# Altium PCB SensorBoardPCB.PcbDoc
Units mm, origin at the board's own origin, x right, y up, seen from the top; angles counter-clockwise.
Board outline 99.95 x 99.95 mm, 2 copper layers (Top Layer, Bottom Layer); 19 components, 29 nets, 128 pads, 0 vias.
Unrouted connection lines stored in the file: 70.
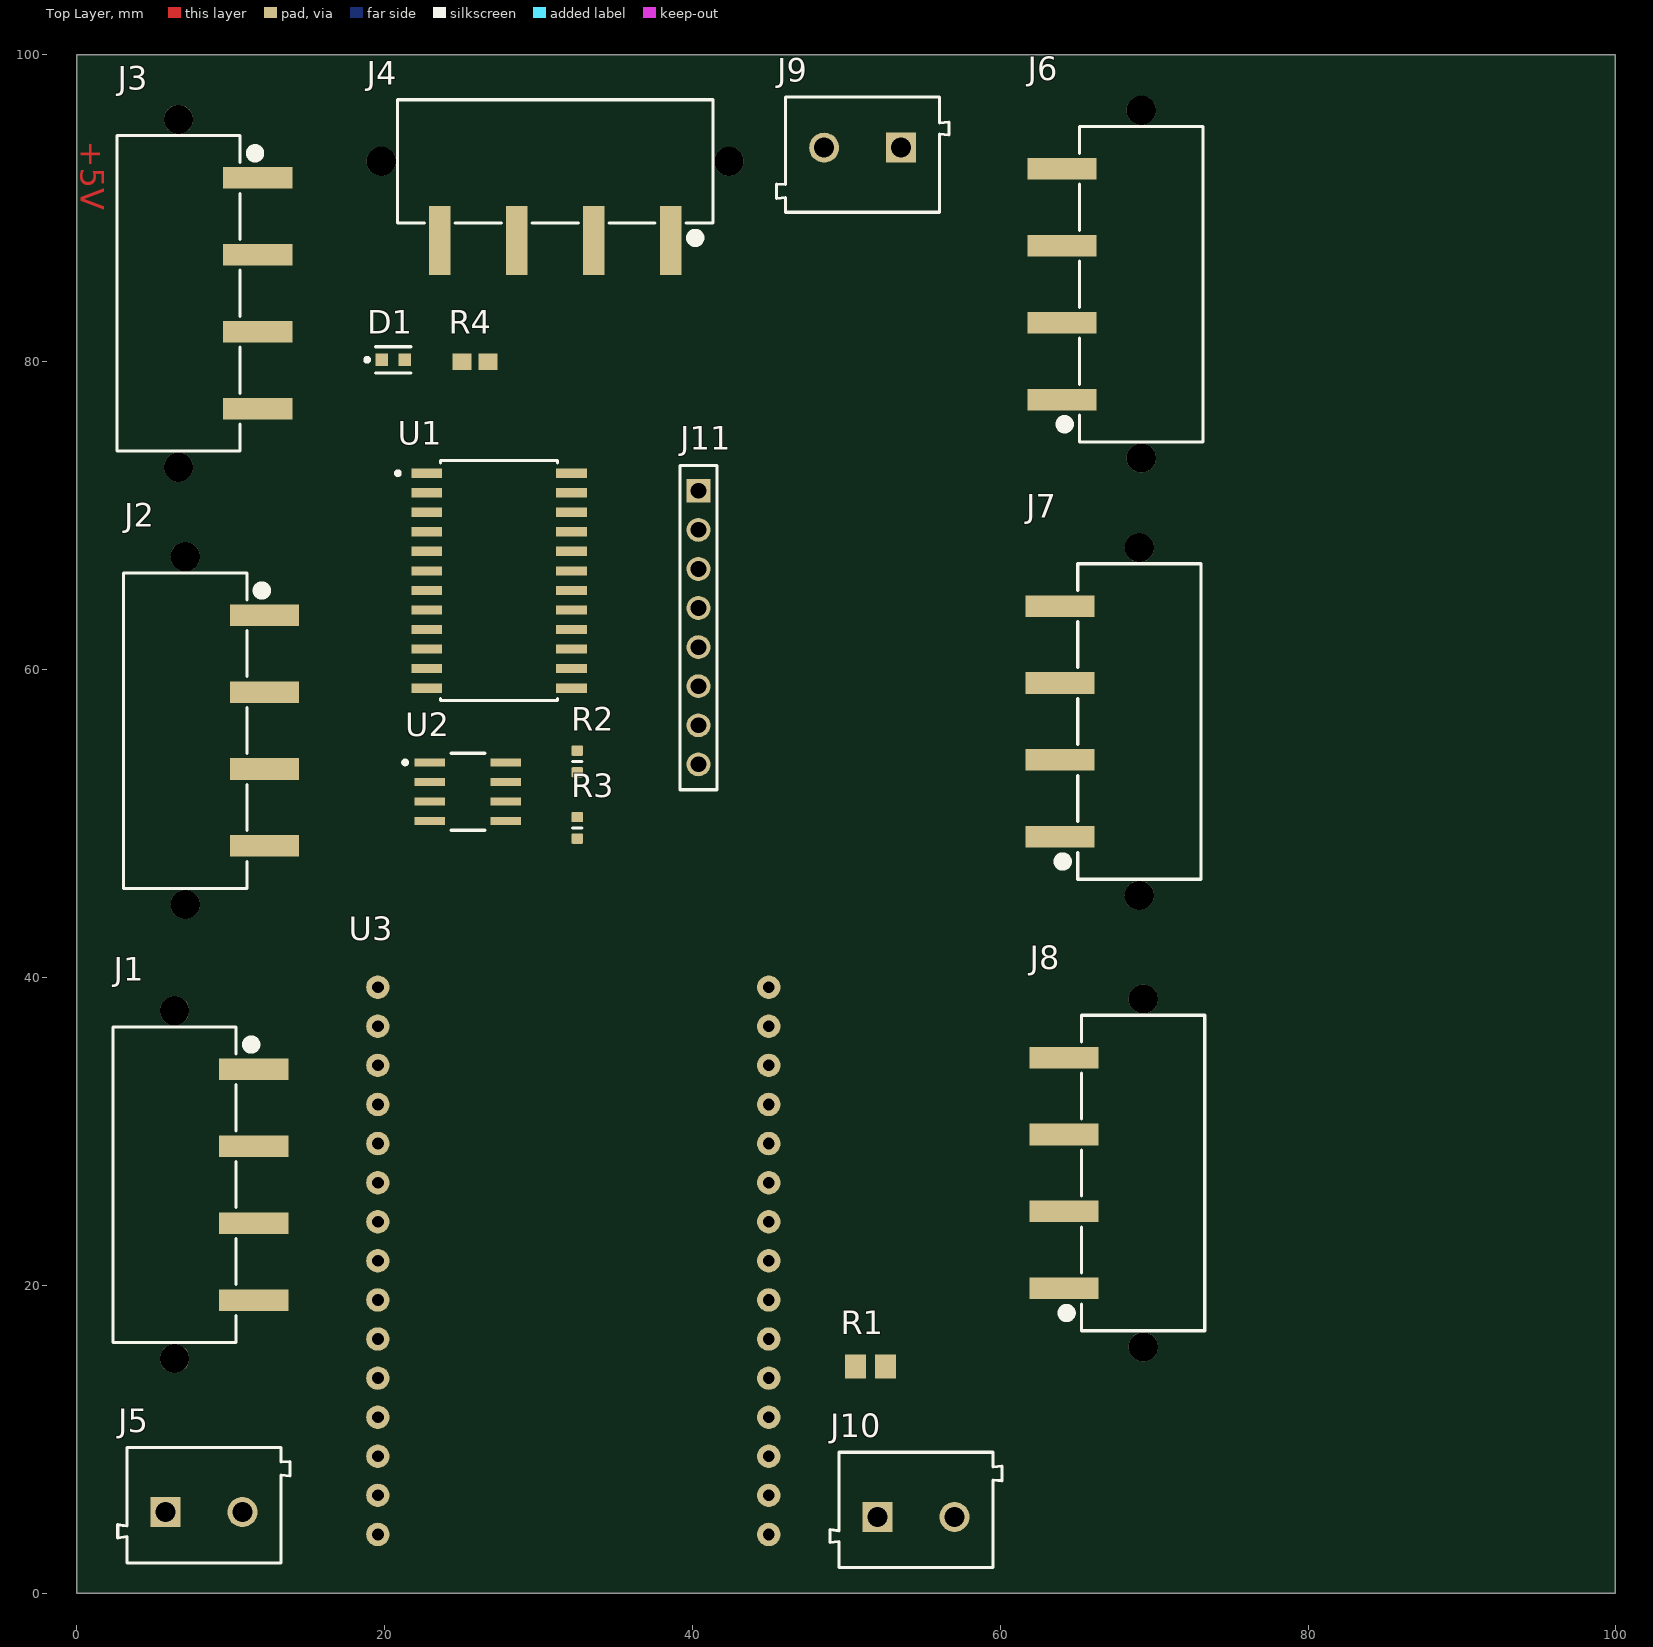
[diagram p0: Top Layer view]
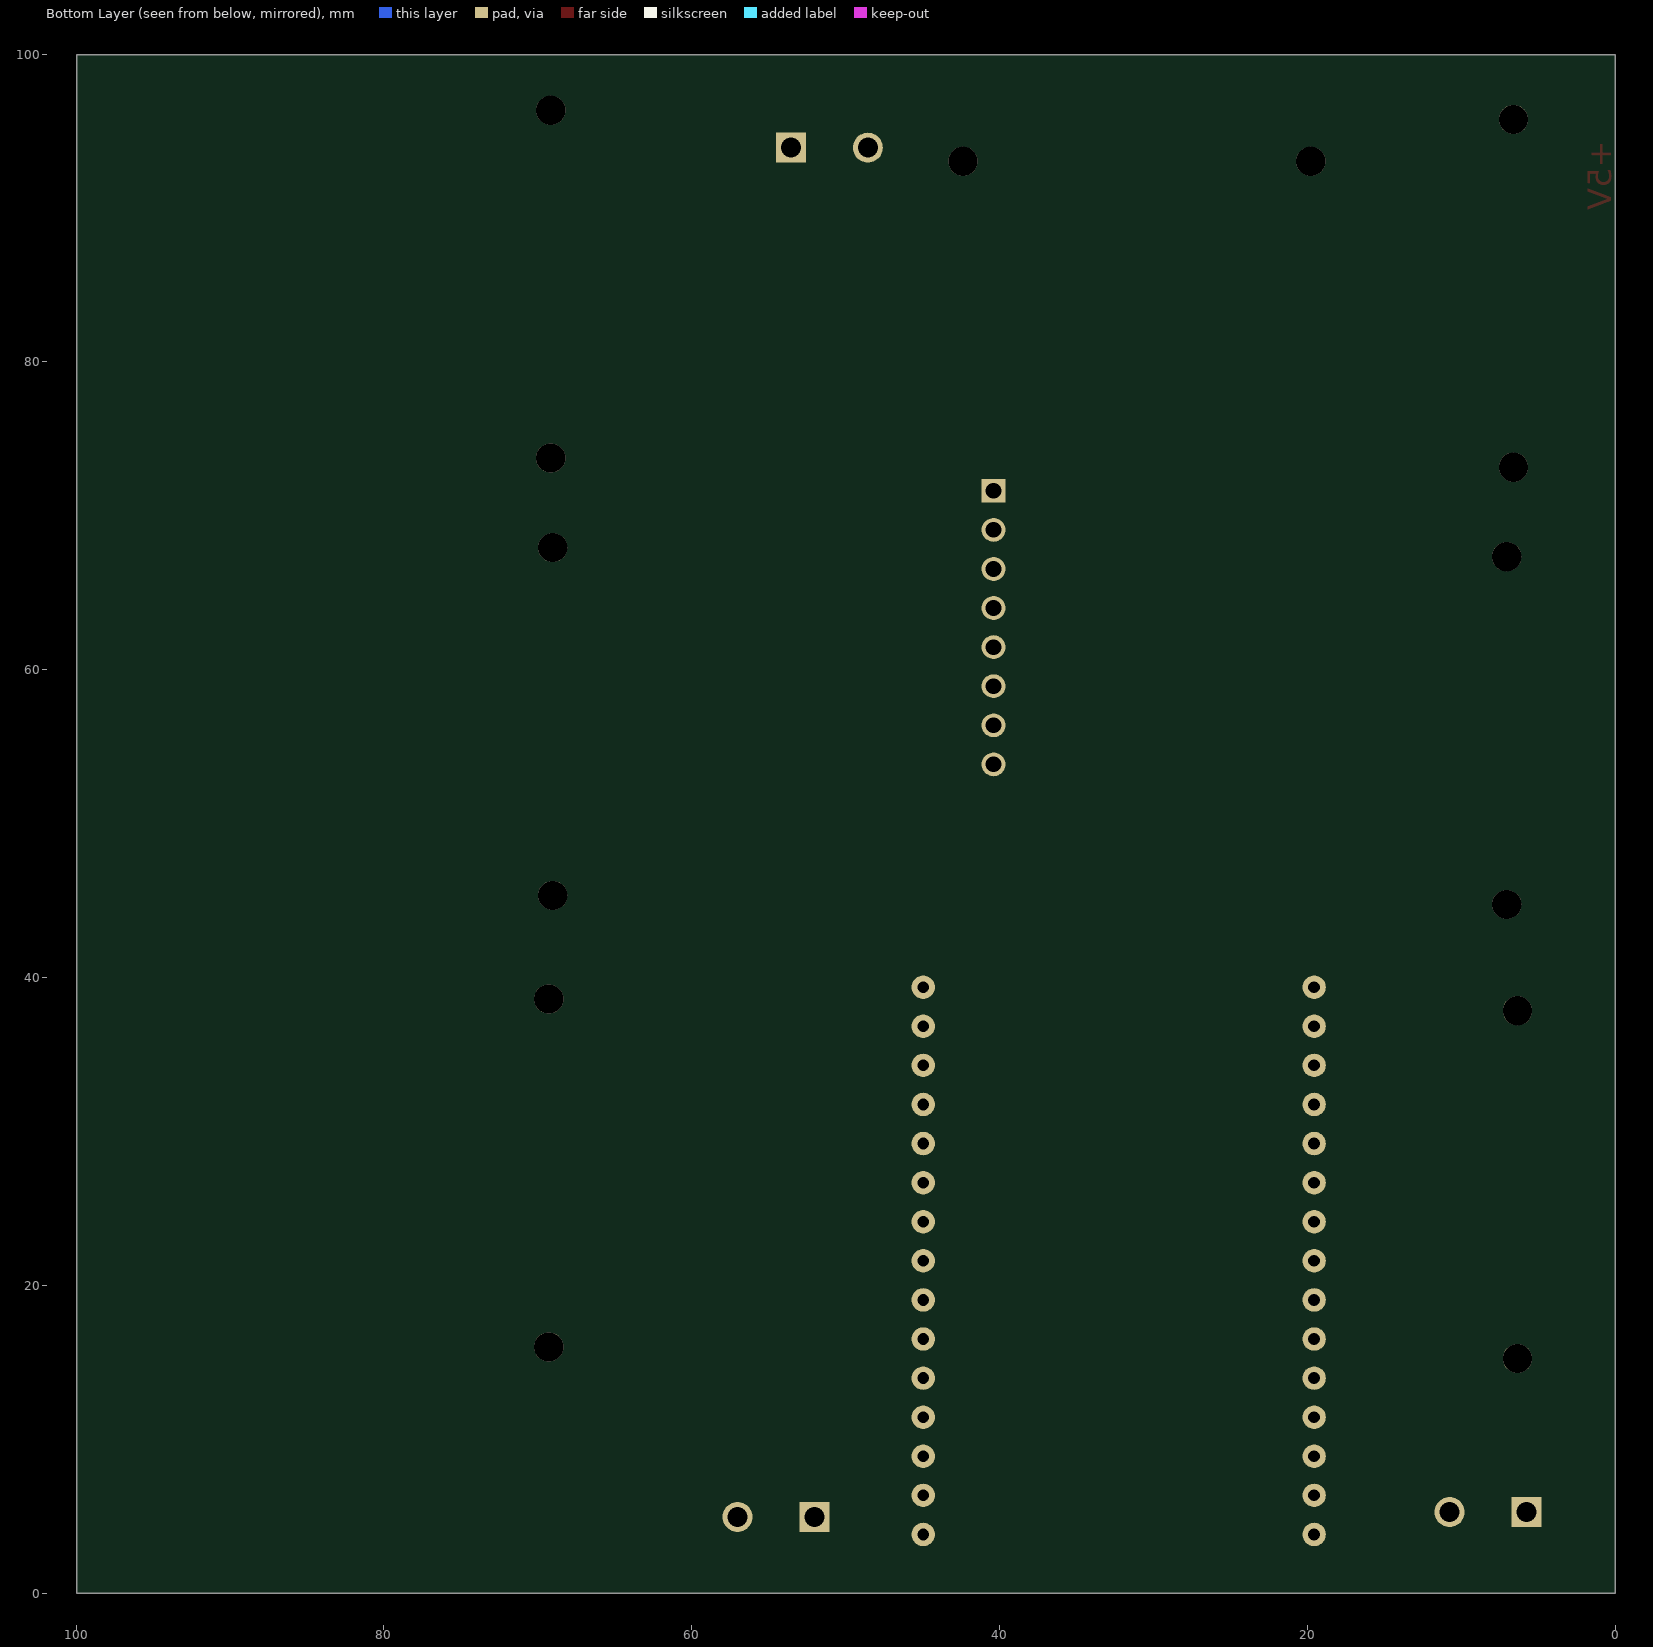
[diagram p1: Bottom Layer view, seen from below]

## Layer stack, top to bottom
Top Solder: solder mask 0.0102, Solder Resist, Dk 3.5
Top Layer: signal copper 0.0356
Dielectric 1: dielectric 0.32, FR-4, Dk 4.8
Bottom Layer: signal copper 0.0356
Bottom Solder: solder mask 0.0102, Solder Resist, Dk 3.5

## Board outline
0,0 0,99.949 99.949,99.949 99.949,0

## Design rules (kind name [scope] priority, off if disabled: settings)
Clearance [All] p1: gap=0.254 ignorepadtopadclearanceinfootprint=FALSE except(0: Arc-Hole Track-Hole SMDPad-Hole THPad-Hole Via-Hole Fill-Hole Poly-Hole Region-Hole Text-Hole)
PolygonConnect [All] p1: connectstyle=Relief reliefconductorwidth=0.254 reliefentries=4 polygonreliefangle="90 Angle" airgapwidth=0.254
RoutingVias [All] p1: holewidth=0.711 width=1.27 viastyle="Through Hole" minholewidth=0.711 minwidth=1.27 maxholewidth=0.711 maxwidth=1.27
SolderMaskExpansion [All] p1: expansion=0.102 istentingtop=FALSE
Width [All] p1: maxlimit=0.254 minlimit=0.254 preferedwidth=0.254
30 further rules are at their usual default settings.

## Classes and differential pairs
component class SensorBoardSchematic: D1 J1 J2 J3 J7 J8 R1 R4 U1 U2 U3

## Components (designator, comment, footprint, x,y, rotation, side; value= is the part's Value field where it differs from the comment)
D1 "LTST-C190KFKT" FP-LTST-C190KFKT-MFG 20.562,80.137 r0 top
J1 "691709710304" 691709710304 6.35,26.543 r270 top
J2 "691709710304" 691709710304 7.042,56.047 r270 top
J3 "691709710304" 691709710304 6.604,84.455 r270 top
J4 "691709710304" 691709710304 31.075,93.034 r180 top
J5 "691102710002" 691102710002 8.255,5.715 r0 top
J6 "691709710304" 691709710304 69.158,85.05 r90 top
J7 "691709710304" 691709710304 69.031,56.635 r90 top
J8 "691709710304" 691709710304 69.285,27.298 r90 top
J9 "691102710002" 691102710002 51.054,93.472 r180 top
J10 "691102710002" 691102710002 54.523,5.403 r0 top
J11 "SSQ-108-01-T-S" SMTC-SSQ-108-01-X-S 40.386,71.628 r270 top
R1 "ERJ-6ENF4700V" RESC2013X70X40ML20T20 51.562,14.732 r0 top
R2 "Jumper 0603" RESC0603(1608)_L 32.512,54.037 r270 top value=120
R3 "Jumper 0603" RESC0603(1608)_L 32.512,49.719 r270 top value=DNF
R4 "FC0603E50R0BTBST1" RESC1608X38X38ML15T13 25.869,80.01 r0 top
U1 "CD74HC4067M96" FP-DW0024A-MFG 27.432,65.786 r0 top
U2 "MAX3485ESA+" FP-S8-5-MFG 25.4,52.07 r0 top
U3 "ESP32-WROOM-32-DEVBOARD_HEADERS" ESP32-WROOM-32-DEVBOARD_HEADERS-Footprint-1 19.558,39.37 r0 top

## Footprints (in the part's own frame and the unit in brackets; to place one, negate y for a bottom-side part, rotate by r counter-clockwise, add the part's x,y. Pads: shape width x height; smd on the part's side, far side on the other; paste and mask are expansions set on the pad)
691102710002 [mm] "5,00mm - modular - blue - Horizontal entry with pressure clamp - 9,9 mm height - 02p"
  rect 1.95x1.95 hole 1.3: 1(-2.5,-0.45)
  round 1.95 hole 1.3: 2(2.5,-0.45)
  silkscreen extent -5.6,-3.75 5.6,3.75, body extent -5.6,-3.75 5.6,3.75, height 9.96
691709710304 [mm] "Horizontal Entry SMT with Pressure Clamp, pitch 5mm, 04p"
  rect 1.4x4.5 smd: 1(-7.5,5.15) 2(-2.5,5.15) 3(2.5,5.15) 4(7.5,5.15)
  round 1.9 hole 1.9 unplated: M1(-11.3,0) M2(11.3,0)
  silkscreen extent -10.25,-4 10.25,5.17, body extent -12,-4 12,7, height 9.95
ESP32-WROOM-32-DEVBOARD_HEADERS-Footprint-1 [mil]
  round 60 hole 30: 3V3(1000,-1400) 5(0,-100) 5V0(0,-1400) 8(0,-200) 9(0,0) 10(0,-300) 11(0,-400) 12(0,-500) 13(0,-600) 14(0,-700) 15(0,-800) 16(0,-900) 17(0,-1000) 18(0,-1100) 20(0,-1200) 21(1000,-1200) 22(1000,-1100) 24(1000,-1000) 25(1000,-900) 27(1000,-800) 34(1000,-700) 35(1000,-600) 36(1000,0) 38(1000,-500) 39(1000,-100) 40(1000,-300) 41(1000,-200) 42(1000,-400) GND1(0,-1300) GND2(1000,-1300)
  body extent -85,-1490 1085,90, height 79
FP-DW0024A-MFG [mm]
  rect 2x0.6 smd paste-1000 mask+0: 1(-4.7,6.985) 2(-4.7,5.715) 3(-4.7,4.445) 4(-4.7,3.175) 5(-4.7,1.905) 6(-4.7,0.635) 7(-4.7,-0.635) 8(-4.7,-1.905) 9(-4.7,-3.175) 10(-4.7,-4.445) 11(-4.7,-5.715) 12(-4.7,-6.985) 13(4.7,-6.985) 14(4.7,-5.715) 15(4.7,-4.445) 16(4.7,-3.175) 17(4.7,-1.905) 18(4.7,-0.635) 19(4.7,0.635) 20(4.7,1.905) 21(4.7,3.175) 22(4.7,4.445) 23(4.7,5.715) 24(4.7,6.985)
  silkscreen extent -6.7,-7.8 3.8,7.8, body extent -5.8,-7.98 5.8,7.98, height 0.25
FP-LTST-C190KFKT-MFG [mm]
  rect 0.8x0.8 smd paste+0 mask+0: 1(-0.75,0) 2(0.75,0)
  silkscreen extent -1.82,-0.85 1.15,0.85, body extent -1.25,-0.55 1.25,0.55, height 0.25
FP-S8-5-MFG [mm]
  rect 1.98x0.53 smd paste+0 mask+0: 1(-2.465,1.905) 2(-2.465,0.635) 3(-2.465,-0.635) 4(-2.465,-1.905) 5(2.465,-1.905) 6(2.465,-0.635) 7(2.465,0.635) 8(2.465,1.905)
  silkscreen extent -4.2,-2.5 1.1,2.5, body extent -3.55,-2.75 3.55,2.75, height 0.25
RESC0603(1608)_L [mm] "Chip Resistor, Body 1.6x0.8mm, IPC High Density"
  rrect25% 0.66x0.76 smd: 1(-0.7,0) 2(0.7,0)
  silkscreen extent 0,-0.3 0,0.3, body extent -0.8,-0.4 0.8,0.4, height 0.45
RESC1608X38X38ML15T13 [mm] "Chip Resistor, 2-Leads, Body 1.63x0.81mm, IPC Low Density"
  rect 1.25x1.05 smd: 1(-0.85,0) 2(0.85,0)
  body extent -0.89,-0.49 0.89,0.49, height 0.39
RESC2013X70X40ML20T20 [mm] "Chip Resistor, 2-Leads, Body 2.00x1.25mm, IPC Low Density"
  rect 1.35x1.55 smd: 1(-0.975,0) 2(0.975,0)
  body extent -1.1,-0.72 1.1,0.72, height 0.7
SMTC-SSQ-108-01-X-S [mm] "SQ Post Socket, 1x8 Pins, Vertical, 2.54mm Pitch, Female"
  rect 1.55x1.55 hole 1.02: 1(0,0)
  round 1.55 hole 1.02: 2(2.54,0) 3(5.08,0) 4(7.62,0) 5(10.16,0) 6(12.7,0) 7(15.24,0) 8(17.78,0)
  silkscreen extent -1.65,-1.2 19.43,1.2, body extent -1.52,-1.21 19.3,1.21, height 8.51

## Part data
D1: library part CMP-1674-00008-2, "LED ORANGE CLEAR CHIP SMD", Case Code (Imperial)=0603, Case Code (Metric)=1608, Color=Orange, Forward Current=30mA, Forward Voltage=2V, Lens Color=Colorless, Max Operating Temperature=85°C, Min Operating Temperature=-55°C, Package Quantity=1, Power Dissipation=75mW, Reverse Voltage=5V, Test Current=20mA, Case/Package=0603, Depth=1.6mm, Dominant Wavelength=605nm, Height=0.8mm, Illumination Color=Orange, Lead Free="Lead Free", Length=3.2mm, Lens Style=Diffused, Lens Transparency=Clear, Luminous Intensity=90mcd, Mount="Surface Mount", Number of Elements=1, Number of LEDs=1, Number of Pins=2, Packaging="Tape and Reel", Power Rating=75mW, Radiation Hardening=No, Viewing Angle=130°, Wavelength=611nm, Width=0.8mm
J1 J2 J3 J4 J6 J7 J8: library part CMP-1502-03337-1, "Serie 7097 - 5.00 mm Horizontal Entry SMT with Pressure Clamp WR-TBL, 4 pin", Manufacturer="Wurth Elektronik", Operating Temperature=-45to130degC, Datasheet URL=http://katalog.we-online.de/em/datasheet/6917097103xx.pdf, Manufacturer URL=http://www.we-online.de, Mounting Technology=SMT, Package Reference=691709710304, Packaging=TapeandReelwithCap, Part Number=691709710304, Pin Number=4, Pitch=5.00mm, Publisher=WurthElektronik
J5 J9 J10: library part CMP-1502-03258-1, "Series 102 - 5.00 mm Horizontal Entry Modular with Pressure Clamp WR-TBL, 2 pin", Manufacturer="Wurth Elektronik", Operating Temperature=-40to105degC, Datasheet URL=http://katalog.we-online.de/em/datasheet/6911027100xx.pdf, Manufacturer URL=http://www.we-online.de, Mounting Technology=THT, Package Reference=691102710002, Packaging=Box, Part Number=691102710002, Pin Number=2, Pitch=5.00mm, Publisher=WurthElektronik
J11: library part CMP-1023-00293-1, "SQ Post Socket, Through-hole, Vertical, -55 to 105 degC, 2.54 mm Pitch, 8-Pin, Female, RoHS", Manufacturer=Samtec, Temperature Range="-55 to 105 degC", ComponentLink1Description="Manufacturer URL", ComponentLink1URL=http://www.samtec.com, ComponentLink2Description=Datasheet, ComponentLink2URL=http://www.samtec.com/documents/webfiles/pdf/SSQ_TH.PDF, ComponentLink3Description="Package Specification", ComponentLink3URL=http://www.samtec.com/documents/webfiles/cpdf/SSQ-1XX-XX-XXX-X-XX-XXX-XX-X-MKT.pdf, DatasheetVersion=F-214, Mounting Technology=Through-hole, Orientation=Vertical, PackageDescription="Assembly, Socket Strip .025[0.64] SQ Tail", PackageReference=SSQ-108-01-X-S, PackageVersion="BD, 6/1987", PartNumber=SSQ-108-01-T-S, Pitch="2.54 mm", RoHS=True
R1: library part CMP-2001-00549-5, "Chip Resistor, 470 Ohm, +/- 1%, 0.125 W, -55 to 155 degC, 0805 (2012 Metric), RoHS, Tape and Reel", Manufacturer=Panasonic, Max Operating Temperature="155 degC", Min Operating Temperature="-55 degC", Package Quantity=1, Voltage Rating="150 V", ComponentLink1Description="Manufacturer URL", ComponentLink1URL=http://www.panasonic.com/, ComponentLink2Description=Datasheet, ComponentLink2URL=http://industrial.panasonic.com/cdbs/www-data/pdf/RDA0000/AOA0000C86.pdf, DatasheetVersion=04/2015, Height="0.6 mm", Length="2 mm", Mount="Surface Mount", Mounting Technology="Surface Mount", PackageDescription="2-Pin Surface Mount Device, Body 2 x 1.25 mm", PackageReference=0805, Packaging="Cut Tape", Pins=2, REACH SVHC=Yes, RoHSCompliant=true
R2 R3: library part CMP-009-00175-3, Case/Package=0603, Max Operating Temperature=155°C, Min Operating Temperature=-55°C, Pins=2
R4: library part CMP-2000-03661-1, Manufacturer="Vishay Dale", Part Number=FC0603E50R0BTBST1
U1: library part CMP-04901-000007-1, "IC MUX/DEMUX 1X16 24SOIC", Ambient Temperature Range High=+125°C, Ambient Temperature Range Low=-55°C, Manufacturer="Texas Instruments", Max Junction Temp=+150°C, Max Supply Voltage=6V, Min Supply Voltage=2V, Package=DW0024A, Quiescent Current=8uA, Temperature="-55°C to +125°C", Automotive=No, Category=IC, ComponentLink2Description=Datasheet, ComponentLink2URL=http://www.ti.com/lit/ds/symlink/cd74hc4067.pdf, Device Class L1="Integrated Circuits (ICs)", Device Class L2="Logic ICs", Device Class L3=Multiplexers, Digikey Description="IC MUX/DEMUX 1X16 24SOIC", Height=2.65mm, Ipc Land Pattern Name=SOIC127P1030X265-24, Lead Free=Yes, Logic Function Desc=Non-Inverting, Manufacturer Part Number=CD74HC4067M96, Mouser Description="Multiplexer Switch ICs Hi-Spd CMOS 16Ch Anl Mltplxr/Demltplxr", Number Of Circuits=1, Number Of Inputs=16, Number Of Outputs=1, Octopart=https://octopart.com/cd74hc4067m96-texas+instruments-722802, Propagation Delay=6ns, RoHS=TRUE, Standoff Height=0.1mm, Temperature Range High=+125°C, Temperature Range Low=-55°C
U2: library part CMP-05679-000020-1, "IC TXRX RS485/422 10MBPS 8SOIC", Manufacturer="Maxim Integrated", Max Junction Temp=+160°C, Max Supply Voltage=3.6V, Min Supply Voltage=3V, Nominal Supply Current=0.95-1.1mA, Package=S8-5, Temperature="-40°C to +85°C", Temperature Range High=+85°C, Temperature Range Low=-40°C, Automotive=No, Category=IC, ComponentLink2Description=Datasheet, ComponentLink2URL=https://datasheets.maximintegrated.com/en/ds/MAX3483-MAX3491.pdf, Data Rate=10Mbits/s, Device Class L1="Integrated Circuits (ICs)", Device Class L2="Interface ICs", Device Class L3="RS-232 / RS-422 / RS-485 Interface ICs", Digikey Description="IC TXRX RS485/422 10MBPS 8SOIC", Footprint Url=https://pdfserv.maximintegrated.com/land_patterns/90-0096.PDF, Height=1.75mm, Interface=RS-485,RS-422, Lead Free=Yes, Manufacturer Part Number=MAX3485ESA+, Mouser Description="3.3V Powered, 10Mbps and Slew-Rate Limited, True RS-485/RS-422 Transceivers", Number Of Receivers=1, Number Of Transmitters=1, Octopart=https://octopart.com/max3485esa%2B-maxim+integrated-39731860, RoHS=TRUE, Simplex Duplex="Half Duplex", Standoff Height=0.1mm
U3: library part CMP-002-00073-5, "Made by Aleksander"

## Nets (pads, with @x,y where several pads share a name; then routed paths per layer and width w, separated by ;. In a path a pad name is that pad's centre, name@x,y a point inside that pad or via, vN(x,y) a via of type N, cw(c..) or ccw(c..) an arc to the next point about the centre after c; other vN are vias at no path point)
3V3: U2.8 U3.3V3
+5: J1.1 J2.1 J3.1 J4.1 J5.1 J6.1 J7.1 J8.1 J11.8 R4.1 U1.24 U3.5V0
DE_ENB: U2.3 U3.35
GND: D1.1 J1.4 J2.4 J3.4 J4.4 J5.2 J6.4 J7.4 J8.4 J10.2 J11.7 U1.2 U1.12 U1.15 U1.16 U1.17 U1.18 U1.19 U1.20 U1.21 U1.22 U1.23 U2.5 U3.GND1 U3.GND2
IMU_INT: J11.1 U3.39
IMU_SCL: J11.6 U3.38
IMU_SDA: J11.5 U3.42
LED_OFFBOARD1: R1.1 U3.36
NetD1_2: D1.2 R4.2
NetJ10_1: J10.1 R1.2
NetR2_2: R2.2 R3.1
RE_ENB: U2.2 U3.34
RS485_A: J9.1 R3.2 U2.6
RS485_B: J9.2 R2.1 U2.7
RX2: U2.1 U3.25
TX2: U2.4 U3.27
US1_TRIG: J1.3 U1.9
US2_TRIG: J2.3 U1.8
US3_TRIG: J3.3 U1.7
US4_TRIG: J4.3 U1.6
US5_TRIG: J6.3 U1.5
US6_TRIG: J7.3 U1.4
US7_TRIG: J8.3 U1.3
US_ECHO: J1.2 J2.2 J3.2 J4.2 J6.2 J7.2 J8.2 U3.10
US_MUX0: U1.10 U3.13
US_MUX1: U1.11 U3.14
US_MUX2: U1.14 U3.15
US_MUX3: U1.13 U3.16
US_MUXTRIG: U1.1 U3.12
pads on no net: J1.M1 J1.M2 J2.M1 J2.M2 J3.M1 J3.M2 J4.M1 J4.M2 J6.M1 J6.M2 J7.M1 J7.M2 J8.M1 J8.M2 J11.2 J11.3 J11.4 U3.5 U3.8 U3.9 U3.11 U3.17 U3.18 U3.20 U3.21 U3.22 U3.24 U3.40 U3.41

## Other copper
Top Layer:
  text "+5V" at 0.254,94.361 h1.52 r270